# EAGLE board KS_Vor (EAGLE 9.5.2)
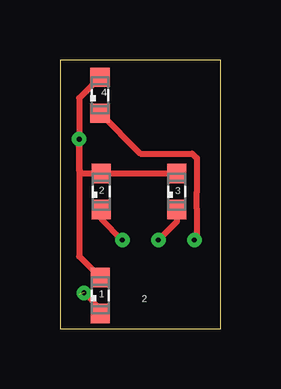
[diagram p0: board, top side]
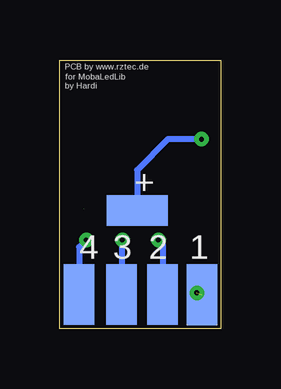
[diagram p1: board, bottom side, seen from below]

Size 6.7 x 11.2 mm. Coordinates in mm from the lower left corner, seen from the top.
Outline: 0,0 6.7,0 6.7,11.2 0,11.2 0,0
Copper layers (1*16): Top 0.035mm / dielectric 1.5mm / Bottom 0.035mm
Design rules "default": minimum track width 10mil, minimum drill 24mil, track to track 8mil, track to pad 8mil, pad to pad 8mil, via to via 8mil, smd to smd 8mil, copper to edge 40mil, drill to drill 8mil, minimum pad ring 10mil, minimum via ring 8mil, stop-mask expansion 4mil, vias tented up to drill 0mil, thermal gap 10mil

## Footprints (pad centres in the part's own frame; a part is rotated, then mirrored left to right if it is on the bottom)
LED_SML0603 = smd 0.8 x 0.8: A 0.75,0; C -0.75,0
SMD1,27-2,54 = smd 1.27 x 2.54: 1 0,0

## Placement (x,y rotation side)
1  [LED_SML0603]  1.68,1.39 90 top
2  [LED_SML0603]  4.87,5.72 90 top
3  [LED_SML0603]  1.72,5.72 90 top
4  [LED_SML0603]  1.67,9.73 90 top
PAD1  [SMD1,27-2,54]  0.79,1.42 0 bottom
PAD6  [SMD1,27-2,54]  4.13,1.43 180 bottom
PAD7  [SMD1,27-2,54]  2.42,1.43 180 bottom
PAD9  [SMD1,27-2,54]  5.9,1.43 180 bottom
PAD+  [SMD1,27-2,54]  3.49,4.93 270 bottom

## Library data of the parts
1-4 = eagle-ltspice; SPICEMODEL: NONE; SPICEPREFIX: D; SPICETYPE: diode
PAD1 PAD6 PAD7 PAD9 PAD+ = wirepad

## Nets
N$1: 1.C PAD1.1
N$2: 2.C PAD6.1
N$3: 3.C PAD7.1
N$4: 4.C PAD9.1
N$+: 1.A 2.A 3.A 4.A PAD+.1

## Tracks (layer width: path | path; a pad name or v marks a point on that pad's centre or on a via)
N$1  (via drill 0.2)  (1 unrouted)
  Top 0.254: 1.C 1.68,0.82 v1,1.5
N$2  (via drill 0.2)
  Top 0.254: 2.C 4.87,4.47 v4.1,3.7
  Bottom 0.254: v4.1,3.7 4.13,3.67 PAD6.1
N$3  (via drill 0.2)
  Top 0.254: 3.C 1.72,4.58 v2.6,3.7
  Bottom 0.254: v2.6,3.7 2.42,3.52 PAD7.1
N$4  (via drill 0.2)  (1 unrouted)
  Top 0.254: 4.C 3.35,7.3 5.51,7.3 5.7,7.11 5.7,5.71 5.71,5.7 5.7,5 | 5.7,5 5.7,3.8 v5.6,3.7
  Bottom 0.254: v5.6,3.7 5.9,3.4 PAD9.1
N$+  (via drill 0.2)
  Top 0.254: 4.8,6.47 2.A 3.A | 1.63,6.24 3.A | 1.65,6.4 3.A | 1.A 0.8,3.02 v0.8,7.9 | 4.A 0.8,9.61 v0.8,7.9 | v0.8,7.9 0.8,6.6 0.93,6.47 3.A
  Bottom 0.254: v0.8,7.9 2.2,7.9 3.49,6.61 PAD+.1

## Text on the board
tNames: 4 | 3 | 1 | 2
bNames: PCB by www.rztec.de | for MobaLedLib / by Hardi | + | 1 | 2 | 3 | 4